# EAGLE board 00A-053-A1-01 (EAGLE 9.6.2)
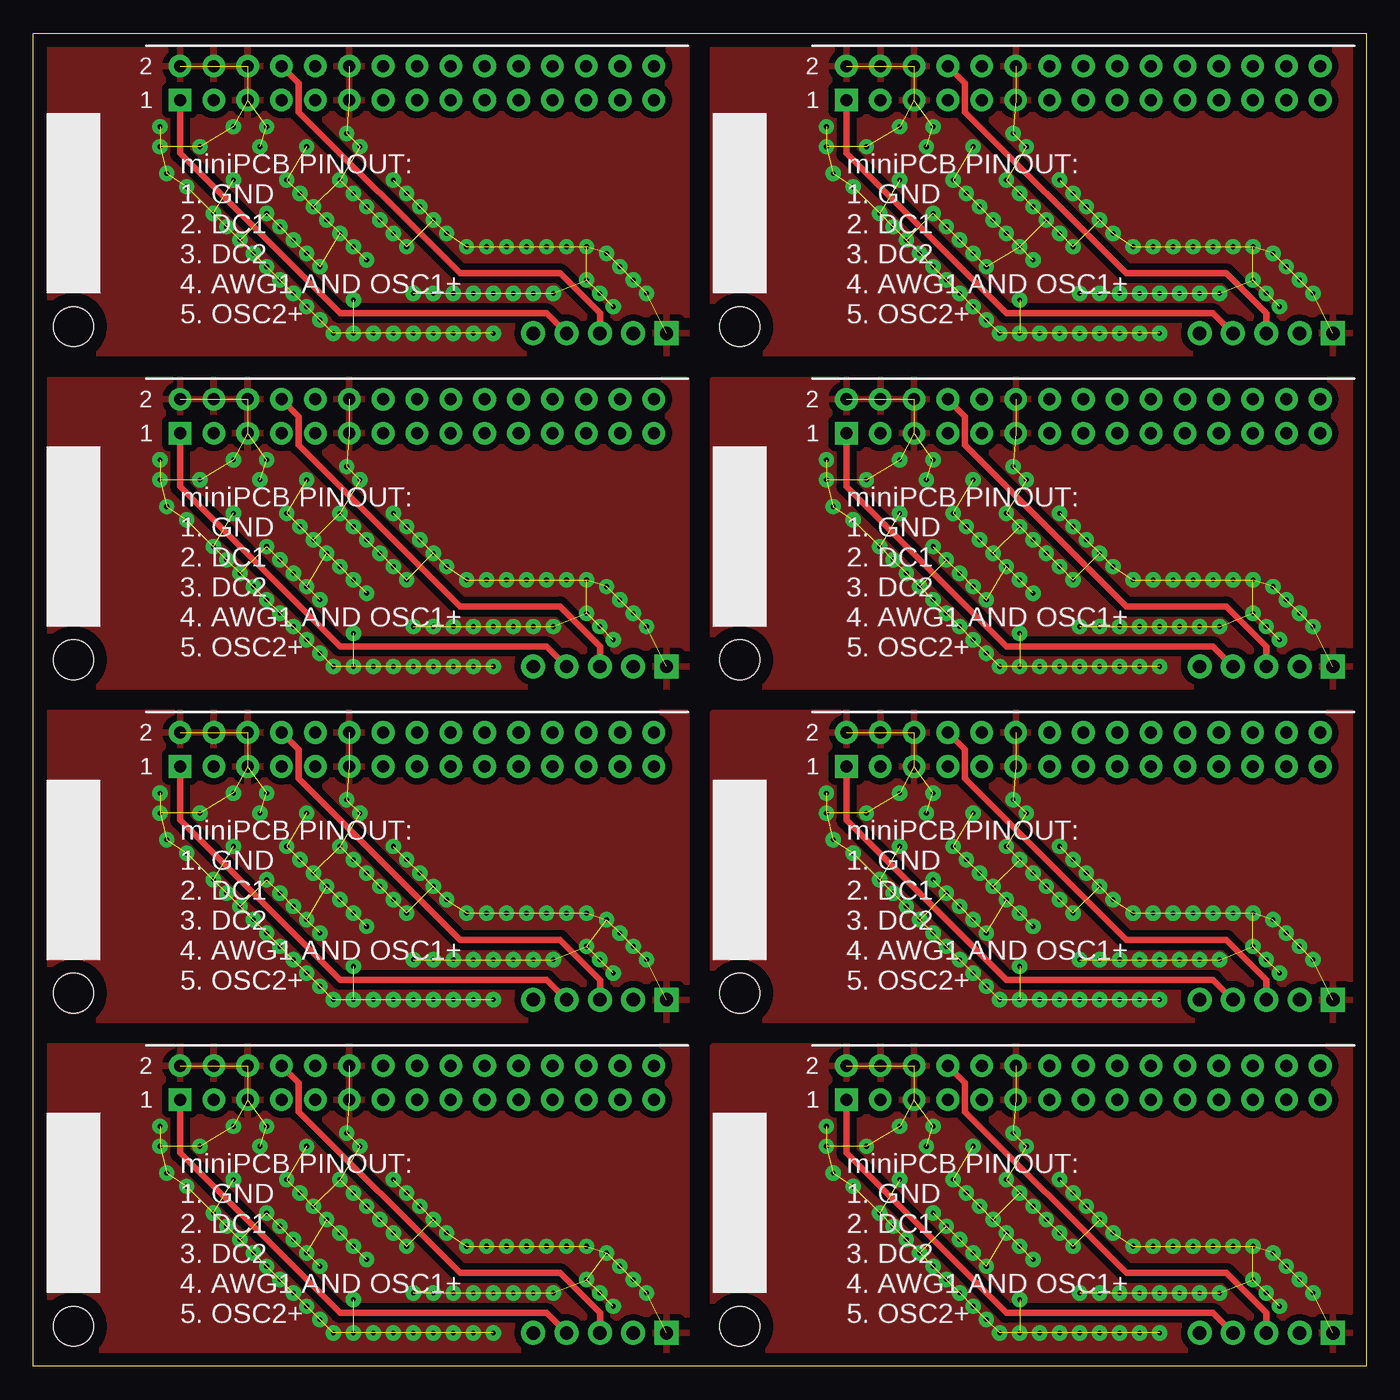
[diagram p0: board, top side]
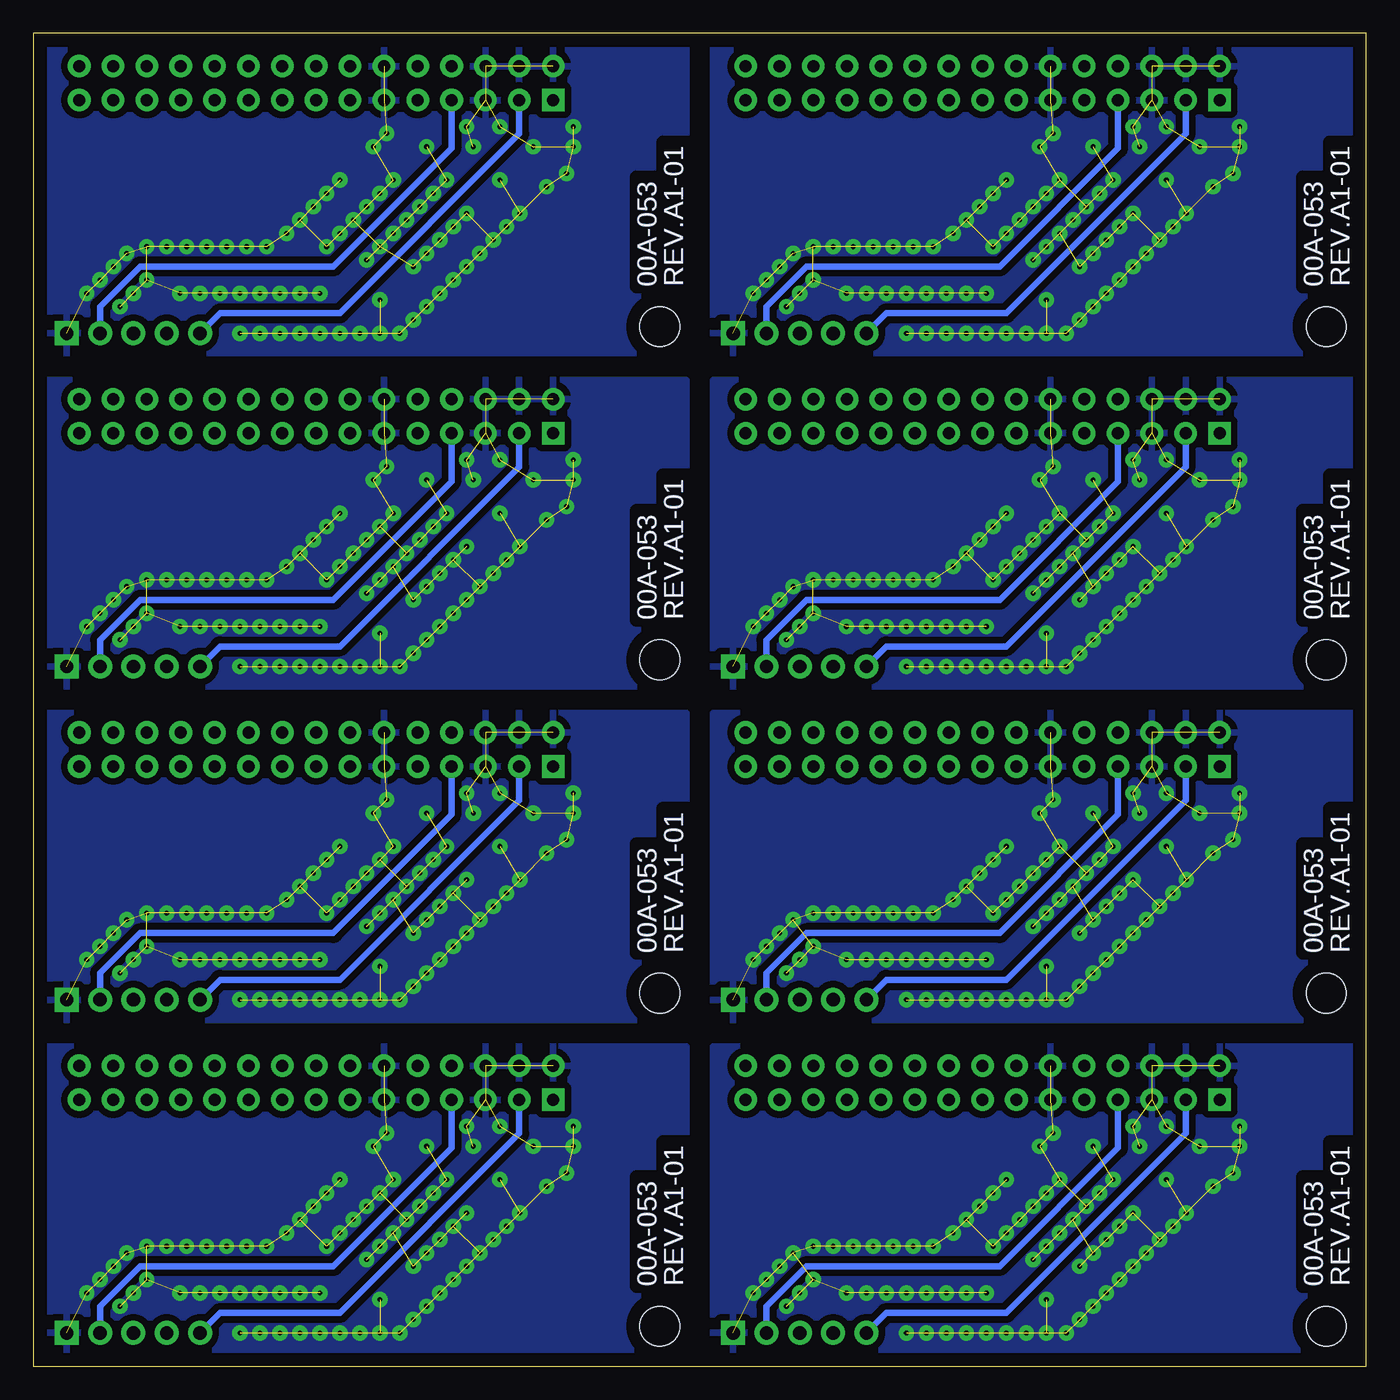
[diagram p1: board, bottom side, seen from below]

Size 100 x 100 mm. Coordinates in mm from the lower left corner, seen from the top.
Outline: 0,0 0,100 100,100 100,0 0,0
Copper layers (1*16): Top 0.035mm / dielectric 1.5mm / Bottom 0.035mm
Design rules "minipcb-THD": minimum track width 0.5mm, minimum drill 0.5mm, track to track 0.5mm, track to pad 0.5mm, pad to pad 0.5mm, via to via 0.5mm, smd to smd 0mil, copper to edge 1mm, drill to drill 1mm, minimum pad ring 0.4mm, minimum via ring 0.4mm, stop-mask expansion 0.1mm, vias tented up to drill 0.6mm, thermal gap 0.5mm

## Footprints (pad centres in the part's own frame; a part is rotated, then mirrored left to right if it is on the bottom)
PINS_1X5 = drill 1 square: 1 0,0 | drill 1: 2 2.5,0; 3 5,0; 4 7.5,0; 5 10,0
MINIPCB_0P_25X50 = hole 3: 3,3
PINS30-2X15 = drill 0.9 square: 1 0,0 | drill 0.9: 2 0,2.54; 3 2.54,0; 4 2.54,2.54; 5 5.08,0; 6 5.08,2.54; 7 7.62,0; 8 7.62,2.54; 9 10.16,0; 10 10.16,2.54; 11 12.7,0; 12 12.7,2.54; 13 15.24,0; 14 15.24,2.54; 15 17.78,0; 16 17.78,2.54; 17 20.32,0; 18 20.32,2.54; 19 22.86,0; 20 22.86,2.54; 21 25.4,0; 22 25.4,2.54; 23 27.94,0; 24 27.94,2.54; 25 30.48,0; 26 30.48,2.54; 27 33.02,0; 28 33.02,2.54; 29 35.56,0; 30 35.56,2.54

## Placement (x,y rotation side)
E$1  [MINIPCB_PANEL_IMAGEFRAME]  -25,-30 0 top  (outside the outline)
P1  [PINS_1X5]  47.5,2.5 180 top
P2  [PINS_1X5]  47.5,27.5 180 top
P3  [PINS_1X5]  47.5,52.5 180 top
P4  [PINS_1X5]  47.5,77.5 180 top
P5  [PINS_1X5]  97.5,2.5 180 top
P6  [PINS_1X5]  97.5,27.5 180 top
P7  [PINS_1X5]  97.5,52.5 180 top
P8  [PINS_1X5]  97.5,77.5 180 top
PCB1  [MINIPCB_0P_25X50]  0,0 0 top
PCB2  [MINIPCB_0P_25X50]  0,25 0 top
PCB3  [MINIPCB_0P_25X50]  0,50 0 top
PCB4  [MINIPCB_0P_25X50]  0,75 0 top
PCB5  [MINIPCB_0P_25X50]  50,0 0 top
PCB6  [MINIPCB_0P_25X50]  50,25 0 top
PCB7  [MINIPCB_0P_25X50]  50,50 0 top
PCB8  [MINIPCB_0P_25X50]  50,75 0 top
U$1  ANALOGDISCOVERY  [PINS30-2X15]  11,20 0 top
U$2  ANALOGDISCOVERY  [PINS30-2X15]  11,45 0 top
U$3  ANALOGDISCOVERY  [PINS30-2X15]  11,70 0 top
U$4  ANALOGDISCOVERY  [PINS30-2X15]  11,95 0 top
U$5  ANALOGDISCOVERY  [PINS30-2X15]  61,20 0 top
U$6  ANALOGDISCOVERY  [PINS30-2X15]  61,45 0 top
U$7  ANALOGDISCOVERY  [PINS30-2X15]  61,70 0 top
U$8  ANALOGDISCOVERY  [PINS30-2X15]  61,95 0 top

## Library data of the parts
E$1 P1-P8 U$1-U$8 = minipcb
PCB1-PCB8 = minipcb; NAME1: TO UUT; PART_NUMBER: 00A-053; REVISION: A1-01

## Nets
GND: P1.1 U$1.2 U$1.4 U$1.5 U$1.6 U$1.11 U$1.12
GND1: P2.1 U$2.2 U$2.4 U$2.5 U$2.6 U$2.11 U$2.12
GND2: P3.1 U$3.2 U$3.4 U$3.5 U$3.6 U$3.11 U$3.12
GND3: P4.1 U$4.2 U$4.4 U$4.5 U$4.6 U$4.11 U$4.12
GND4: P5.1 U$5.2 U$5.4 U$5.5 U$5.6 U$5.11 U$5.12
GND5: P6.1 U$6.2 U$6.4 U$6.5 U$6.6 U$6.11 U$6.12
GND6: P7.1 U$7.2 U$7.4 U$7.5 U$7.6 U$7.11 U$7.12
GND7: P8.1 U$8.2 U$8.4 U$8.5 U$8.6 U$8.11 U$8.12
N$1: P1.5 U$1.3
N$2: P1.4 U$1.1
N$3: P1.2 U$1.7
N$4: P1.3 U$1.8
N$5: P2.5 U$2.3
N$6: P2.4 U$2.1
N$7: P2.2 U$2.7
N$8: P2.3 U$2.8
N$9: P3.5 U$3.3
N$10: P3.4 U$3.1
N$11: P3.2 U$3.7
N$12: P3.3 U$3.8
N$13: P4.5 U$4.3
N$14: P4.4 U$4.1
N$15: P4.2 U$4.7
N$16: P4.3 U$4.8
N$17: P5.5 U$5.3
N$18: P5.4 U$5.1
N$19: P5.2 U$5.7
N$20: P5.3 U$5.8
N$21: P6.5 U$6.3
N$22: P6.4 U$6.1
N$23: P6.2 U$6.7
N$24: P6.3 U$6.8
N$25: P7.5 U$7.3
N$26: P7.4 U$7.1
N$27: P7.2 U$7.7
N$28: P7.3 U$7.8
N$29: P8.5 U$8.3
N$30: P8.4 U$8.1
N$31: P8.2 U$8.7
N$32: P8.3 U$8.8

## Tracks (layer width: path | path; a pad name or v marks a point on that pad's centre or on a via)
GND  (via drill 0.35)  (82 unrouted)
  other vias: 39,5.5 37.5,5.5 36,5.5 34.5,5.5 33,5.5 31.5,5.5 30,5.5 28.5,5.5 32.5,9 34,9 35.5,9 37,9 38.5,9 40,9 41.5,9 43,8.5 44,7.5 45,6.5 46,5.5 41.5,6.5 42.5,5.5 43.5,4.5 34.5,2.5 33,2.5 31.5,2.5 30,2.5 28.5,2.5 27,2.5 25.5,2.5 24,5 21.5,7.5 20.5,8.5 19.5,9.5 18.5,10.5 17.5,11.5 12.5,16.5 15,14 19,14 20,13 21,12 22,11 23,10 24,9 25,8 28,9 27,10 26,11 25,12 24,13 23,14 20.5,16.5 17,16.5 17.5,18 15,18 23.5,17.5 24.5,16.5 27,14 28,13 29,12 30,11 31,10 9.5,16.5 10,14.5 11.5,13.5 13.5,11.5 14.5,10.5 15.5,9.5 16.5,8.5 17.5,7.5 18.5,6.5 19.5,5.5 20.5,4.5 21.5,3.5 24,2.5 22.5,2.5 9.5,18
  pour Top: 1,1 49,1 49,24 1,24
  pour Bottom: 1,1 49,1 49,24 1,24
GND1  (via drill 0.35)  (82 unrouted)
  other vias: 39,30.5 37.5,30.5 36,30.5 34.5,30.5 33,30.5 31.5,30.5 30,30.5 28.5,30.5 32.5,34 34,34 35.5,34 37,34 38.5,34 40,34 41.5,34 43,33.5 44,32.5 45,31.5 46,30.5 41.5,31.5 42.5,30.5 43.5,29.5 34.5,27.5 33,27.5 31.5,27.5 30,27.5 28.5,27.5 27,27.5 25.5,27.5 24,30 21.5,32.5 20.5,33.5 19.5,34.5 18.5,35.5 17.5,36.5 12.5,41.5 15,39 19,39 20,38 21,37 22,36 23,35 24,34 25,33 28,34 27,35 26,36 25,37 24,38 23,39 20.5,41.5 17,41.5 17.5,43 15,43 23.5,42.5 24.5,41.5 27,39 28,38 29,37 30,36 31,35 9.5,41.5 10,39.5 11.5,38.5 13.5,36.5 14.5,35.5 15.5,34.5 16.5,33.5 17.5,32.5 18.5,31.5 19.5,30.5 20.5,29.5 21.5,28.5 24,27.5 22.5,27.5 9.5,43
  pour Top: 1,26 49,26 49,49 1,49
  pour Bottom: 1,26 49,26 49,49 1,49
GND2  (via drill 0.35)  (82 unrouted)
  other vias: 39,55.5 37.5,55.5 36,55.5 34.5,55.5 33,55.5 31.5,55.5 30,55.5 28.5,55.5 32.5,59 34,59 35.5,59 37,59 38.5,59 40,59 41.5,59 43,58.5 44,57.5 45,56.5 46,55.5 41.5,56.5 42.5,55.5 43.5,54.5 34.5,52.5 33,52.5 31.5,52.5 30,52.5 28.5,52.5 27,52.5 25.5,52.5 24,55 21.5,57.5 20.5,58.5 19.5,59.5 18.5,60.5 17.5,61.5 12.5,66.5 15,64 19,64 20,63 21,62 22,61 23,60 24,59 25,58 28,59 27,60 26,61 25,62 24,63 23,64 20.5,66.5 17,66.5 17.5,68 15,68 23.5,67.5 24.5,66.5 27,64 28,63 29,62 30,61 31,60 9.5,66.5 10,64.5 11.5,63.5 13.5,61.5 14.5,60.5 15.5,59.5 16.5,58.5 17.5,57.5 18.5,56.5 19.5,55.5 20.5,54.5 21.5,53.5 24,52.5 22.5,52.5 9.5,68
  pour Top: 1,51 49,51 49,74 1,74
  pour Bottom: 1,51 49,51 49,74 1,74
GND3  (via drill 0.35)  (82 unrouted)
  other vias: 39,80.5 37.5,80.5 36,80.5 34.5,80.5 33,80.5 31.5,80.5 30,80.5 28.5,80.5 32.5,84 34,84 35.5,84 37,84 38.5,84 40,84 41.5,84 43,83.5 44,82.5 45,81.5 46,80.5 41.5,81.5 42.5,80.5 43.5,79.5 34.5,77.5 33,77.5 31.5,77.5 30,77.5 28.5,77.5 27,77.5 25.5,77.5 24,80 21.5,82.5 20.5,83.5 19.5,84.5 18.5,85.5 17.5,86.5 12.5,91.5 15,89 19,89 20,88 21,87 22,86 23,85 24,84 25,83 28,84 27,85 26,86 25,87 24,88 23,89 20.5,91.5 17,91.5 17.5,93 15,93 23.5,92.5 24.5,91.5 27,89 28,88 29,87 30,86 31,85 9.5,91.5 10,89.5 11.5,88.5 13.5,86.5 14.5,85.5 15.5,84.5 16.5,83.5 17.5,82.5 18.5,81.5 19.5,80.5 20.5,79.5 21.5,78.5 24,77.5 22.5,77.5 9.5,93
  pour Top: 1,76 49,76 49,99 1,99
  pour Bottom: 1,76 49,76 49,99 1,99
GND4  (via drill 0.35)  (82 unrouted)
  other vias: 89,5.5 87.5,5.5 86,5.5 84.5,5.5 83,5.5 81.5,5.5 80,5.5 78.5,5.5 82.5,9 84,9 85.5,9 87,9 88.5,9 90,9 91.5,9 93,8.5 94,7.5 95,6.5 96,5.5 91.5,6.5 92.5,5.5 93.5,4.5 84.5,2.5 83,2.5 81.5,2.5 80,2.5 78.5,2.5 77,2.5 75.5,2.5 74,5 71.5,7.5 70.5,8.5 69.5,9.5 68.5,10.5 67.5,11.5 62.5,16.5 65,14 69,14 70,13 71,12 72,11 73,10 74,9 75,8 78,9 77,10 76,11 75,12 74,13 73,14 70.5,16.5 67,16.5 67.5,18 65,18 73.5,17.5 74.5,16.5 77,14 78,13 79,12 80,11 81,10 59.5,16.5 60,14.5 61.5,13.5 63.5,11.5 64.5,10.5 65.5,9.5 66.5,8.5 67.5,7.5 68.5,6.5 69.5,5.5 70.5,4.5 71.5,3.5 74,2.5 72.5,2.5 59.5,18
  pour Top: 51,1 99,1 99,24 51,24
  pour Bottom: 51,1 99,1 99,24 51,24
GND5  (via drill 0.35)  (82 unrouted)
  other vias: 89,30.5 87.5,30.5 86,30.5 84.5,30.5 83,30.5 81.5,30.5 80,30.5 78.5,30.5 82.5,34 84,34 85.5,34 87,34 88.5,34 90,34 91.5,34 93,33.5 94,32.5 95,31.5 96,30.5 91.5,31.5 92.5,30.5 93.5,29.5 84.5,27.5 83,27.5 81.5,27.5 80,27.5 78.5,27.5 77,27.5 75.5,27.5 74,30 71.5,32.5 70.5,33.5 69.5,34.5 68.5,35.5 67.5,36.5 62.5,41.5 65,39 69,39 70,38 71,37 72,36 73,35 74,34 75,33 78,34 77,35 76,36 75,37 74,38 73,39 70.5,41.5 67,41.5 67.5,43 65,43 73.5,42.5 74.5,41.5 77,39 78,38 79,37 80,36 81,35 59.5,41.5 60,39.5 61.5,38.5 63.5,36.5 64.5,35.5 65.5,34.5 66.5,33.5 67.5,32.5 68.5,31.5 69.5,30.5 70.5,29.5 71.5,28.5 74,27.5 72.5,27.5 59.5,43
  pour Top: 51,26 99,26 99,49 51,49
  pour Bottom: 51,26 99,26 99,49 51,49
GND6  (via drill 0.35)  (82 unrouted)
  other vias: 89,55.5 87.5,55.5 86,55.5 84.5,55.5 83,55.5 81.5,55.5 80,55.5 78.5,55.5 82.5,59 84,59 85.5,59 87,59 88.5,59 90,59 91.5,59 93,58.5 94,57.5 95,56.5 96,55.5 91.5,56.5 92.5,55.5 93.5,54.5 84.5,52.5 83,52.5 81.5,52.5 80,52.5 78.5,52.5 77,52.5 75.5,52.5 74,55 71.5,57.5 70.5,58.5 69.5,59.5 68.5,60.5 67.5,61.5 62.5,66.5 65,64 69,64 70,63 71,62 72,61 73,60 74,59 75,58 78,59 77,60 76,61 75,62 74,63 73,64 70.5,66.5 67,66.5 67.5,68 65,68 73.5,67.5 74.5,66.5 77,64 78,63 79,62 80,61 81,60 59.5,66.5 60,64.5 61.5,63.5 63.5,61.5 64.5,60.5 65.5,59.5 66.5,58.5 67.5,57.5 68.5,56.5 69.5,55.5 70.5,54.5 71.5,53.5 74,52.5 72.5,52.5 59.5,68
  pour Top: 51,51 99,51 99,74 51,74
  pour Bottom: 51,51 99,51 99,74 51,74
GND7  (via drill 0.35)  (82 unrouted)
  other vias: 89,80.5 87.5,80.5 86,80.5 84.5,80.5 83,80.5 81.5,80.5 80,80.5 78.5,80.5 82.5,84 84,84 85.5,84 87,84 88.5,84 90,84 91.5,84 93,83.5 94,82.5 95,81.5 96,80.5 91.5,81.5 92.5,80.5 93.5,79.5 84.5,77.5 83,77.5 81.5,77.5 80,77.5 78.5,77.5 77,77.5 75.5,77.5 74,80 71.5,82.5 70.5,83.5 69.5,84.5 68.5,85.5 67.5,86.5 62.5,91.5 65,89 69,89 70,88 71,87 72,86 73,85 74,84 75,83 78,84 77,85 76,86 75,87 74,88 73,89 70.5,91.5 67,91.5 67.5,93 65,93 73.5,92.5 74.5,91.5 77,89 78,88 79,87 80,86 81,85 59.5,91.5 60,89.5 61.5,88.5 63.5,86.5 64.5,85.5 65.5,84.5 66.5,83.5 67.5,82.5 68.5,81.5 69.5,80.5 70.5,79.5 71.5,78.5 74,77.5 72.5,77.5 59.5,93
  pour Top: 51,76 99,76 99,99 51,99
  pour Bottom: 51,76 99,76 99,99 51,99
N$1
  Bottom 0.5: P1.5 36,4 27,4 13.54,17.46 U$1.3
N$2
  Top 0.5: P1.4 38.5,4 23,4 11,16 U$1.1
N$3
  Bottom 0.5: U$1.7 18.62,16.38 27.5,7.5 42,7.5 45,4.5 P1.2
N$4
  Top 0.5: U$1.8 19.9,21.26 19.9,19.1 32,7 39.5,7 42.5,4 P1.3
N$5
  Bottom 0.5: P2.5 36,29 27,29 13.54,42.46 U$2.3
N$6
  Top 0.5: P2.4 38.5,29 23,29 11,41 U$2.1
N$7
  Bottom 0.5: U$2.7 18.62,41.38 27.5,32.5 42,32.5 45,29.5 P2.2
N$8
  Top 0.5: U$2.8 19.9,46.26 19.9,44.1 32,32 39.5,32 42.5,29 P2.3
N$9
  Bottom 0.5: P3.5 36,54 27,54 13.54,67.46 U$3.3
N$10
  Top 0.5: P3.4 38.5,54 23,54 11,66 U$3.1
N$11
  Bottom 0.5: U$3.7 18.62,66.38 27.5,57.5 42,57.5 45,54.5 P3.2
N$12
  Top 0.5: U$3.8 19.9,71.26 19.9,69.1 32,57 39.5,57 42.5,54 P3.3
N$13
  Bottom 0.5: P4.5 36,79 27,79 13.54,92.46 U$4.3
N$14
  Top 0.5: P4.4 38.5,79 23,79 11,91 U$4.1
N$15
  Bottom 0.5: U$4.7 18.62,91.38 27.5,82.5 42,82.5 45,79.5 P4.2
N$16
  Top 0.5: U$4.8 19.9,96.26 19.9,94.1 32,82 39.5,82 42.5,79 P4.3
N$17
  Bottom 0.5: P5.5 86,4 77,4 63.54,17.46 U$5.3
N$18
  Top 0.5: P5.4 88.5,4 73,4 61,16 U$5.1
N$19
  Bottom 0.5: U$5.7 68.62,16.38 77.5,7.5 92,7.5 95,4.5 P5.2
N$20
  Top 0.5: U$5.8 69.9,21.26 69.9,19.1 82,7 89.5,7 92.5,4 P5.3
N$21
  Bottom 0.5: P6.5 86,29 77,29 63.54,42.46 U$6.3
N$22
  Top 0.5: P6.4 88.5,29 73,29 61,41 U$6.1
N$23
  Bottom 0.5: U$6.7 68.62,41.38 77.5,32.5 92,32.5 95,29.5 P6.2
N$24
  Top 0.5: U$6.8 69.9,46.26 69.9,44.1 82,32 89.5,32 92.5,29 P6.3
N$25
  Bottom 0.5: P7.5 86,54 77,54 63.54,67.46 U$7.3
N$26
  Top 0.5: P7.4 88.5,54 73,54 61,66 U$7.1
N$27
  Bottom 0.5: U$7.7 68.62,66.38 77.5,57.5 92,57.5 95,54.5 P7.2
N$28
  Top 0.5: U$7.8 69.9,71.26 69.9,69.1 82,57 89.5,57 92.5,54 P7.3
N$29
  Bottom 0.5: P8.5 86,79 77,79 63.54,92.46 U$8.3
N$30
  Top 0.5: P8.4 88.5,79 73,79 61,91 U$8.1
N$31
  Bottom 0.5: U$8.7 68.62,91.38 77.5,82.5 92,82.5 95,79.5 P8.2
N$32
  Top 0.5: U$8.8 69.9,96.26 69.9,94.1 82,82 89.5,82 92.5,79 P8.3

## Text on the board
tPlace: miniPCB PINOUT: / 1. GND / 2. DC1 / 3. DC2 / 4. AWG1 AND OSC1+ / 5. OSC2+ | miniPCB PINOUT: / 1. GND / 2. DC1 / 3. DC2 / 4. AWG1 AND OSC1+ / 5. OSC2+ | miniPCB PINOUT: / 1. GND / 2. DC1 / 3. DC2 / 4. AWG1 AND OSC1+ / 5. OSC2+ | miniPCB PINOUT: / 1. GND / 2. DC1 / 3. DC2 / 4. AWG1 AND OSC1+ / 5. OSC2+ | miniPCB PINOUT: / 1. GND / 2. DC1 / 3. DC2 / 4. AWG1 AND OSC1+ / 5. OSC2+ | miniPCB PINOUT: / 1. GND / 2. DC1 / 3. DC2 / 4. AWG1 AND OSC1+ / 5. OSC2+ | miniPCB PINOUT: / 1. GND / 2. DC1 / 3. DC2 / 4. AWG1 AND OSC1+ / 5. OSC2+ | miniPCB PINOUT: / 1. GND / 2. DC1 / 3. DC2 / 4. AWG1 AND OSC1+ / 5. OSC2+